# Altium PCB main.PcbDoc (part 1 of 2)
Units mm, origin at the board's own origin, x right, y up, seen from the top; angles counter-clockwise.
Board outline 184.25 x 118.77 mm, 4 copper layers (TopLayer, GND, VCC, BottomLayer); 161 components, 153 nets, 675 pads, 230 vias.
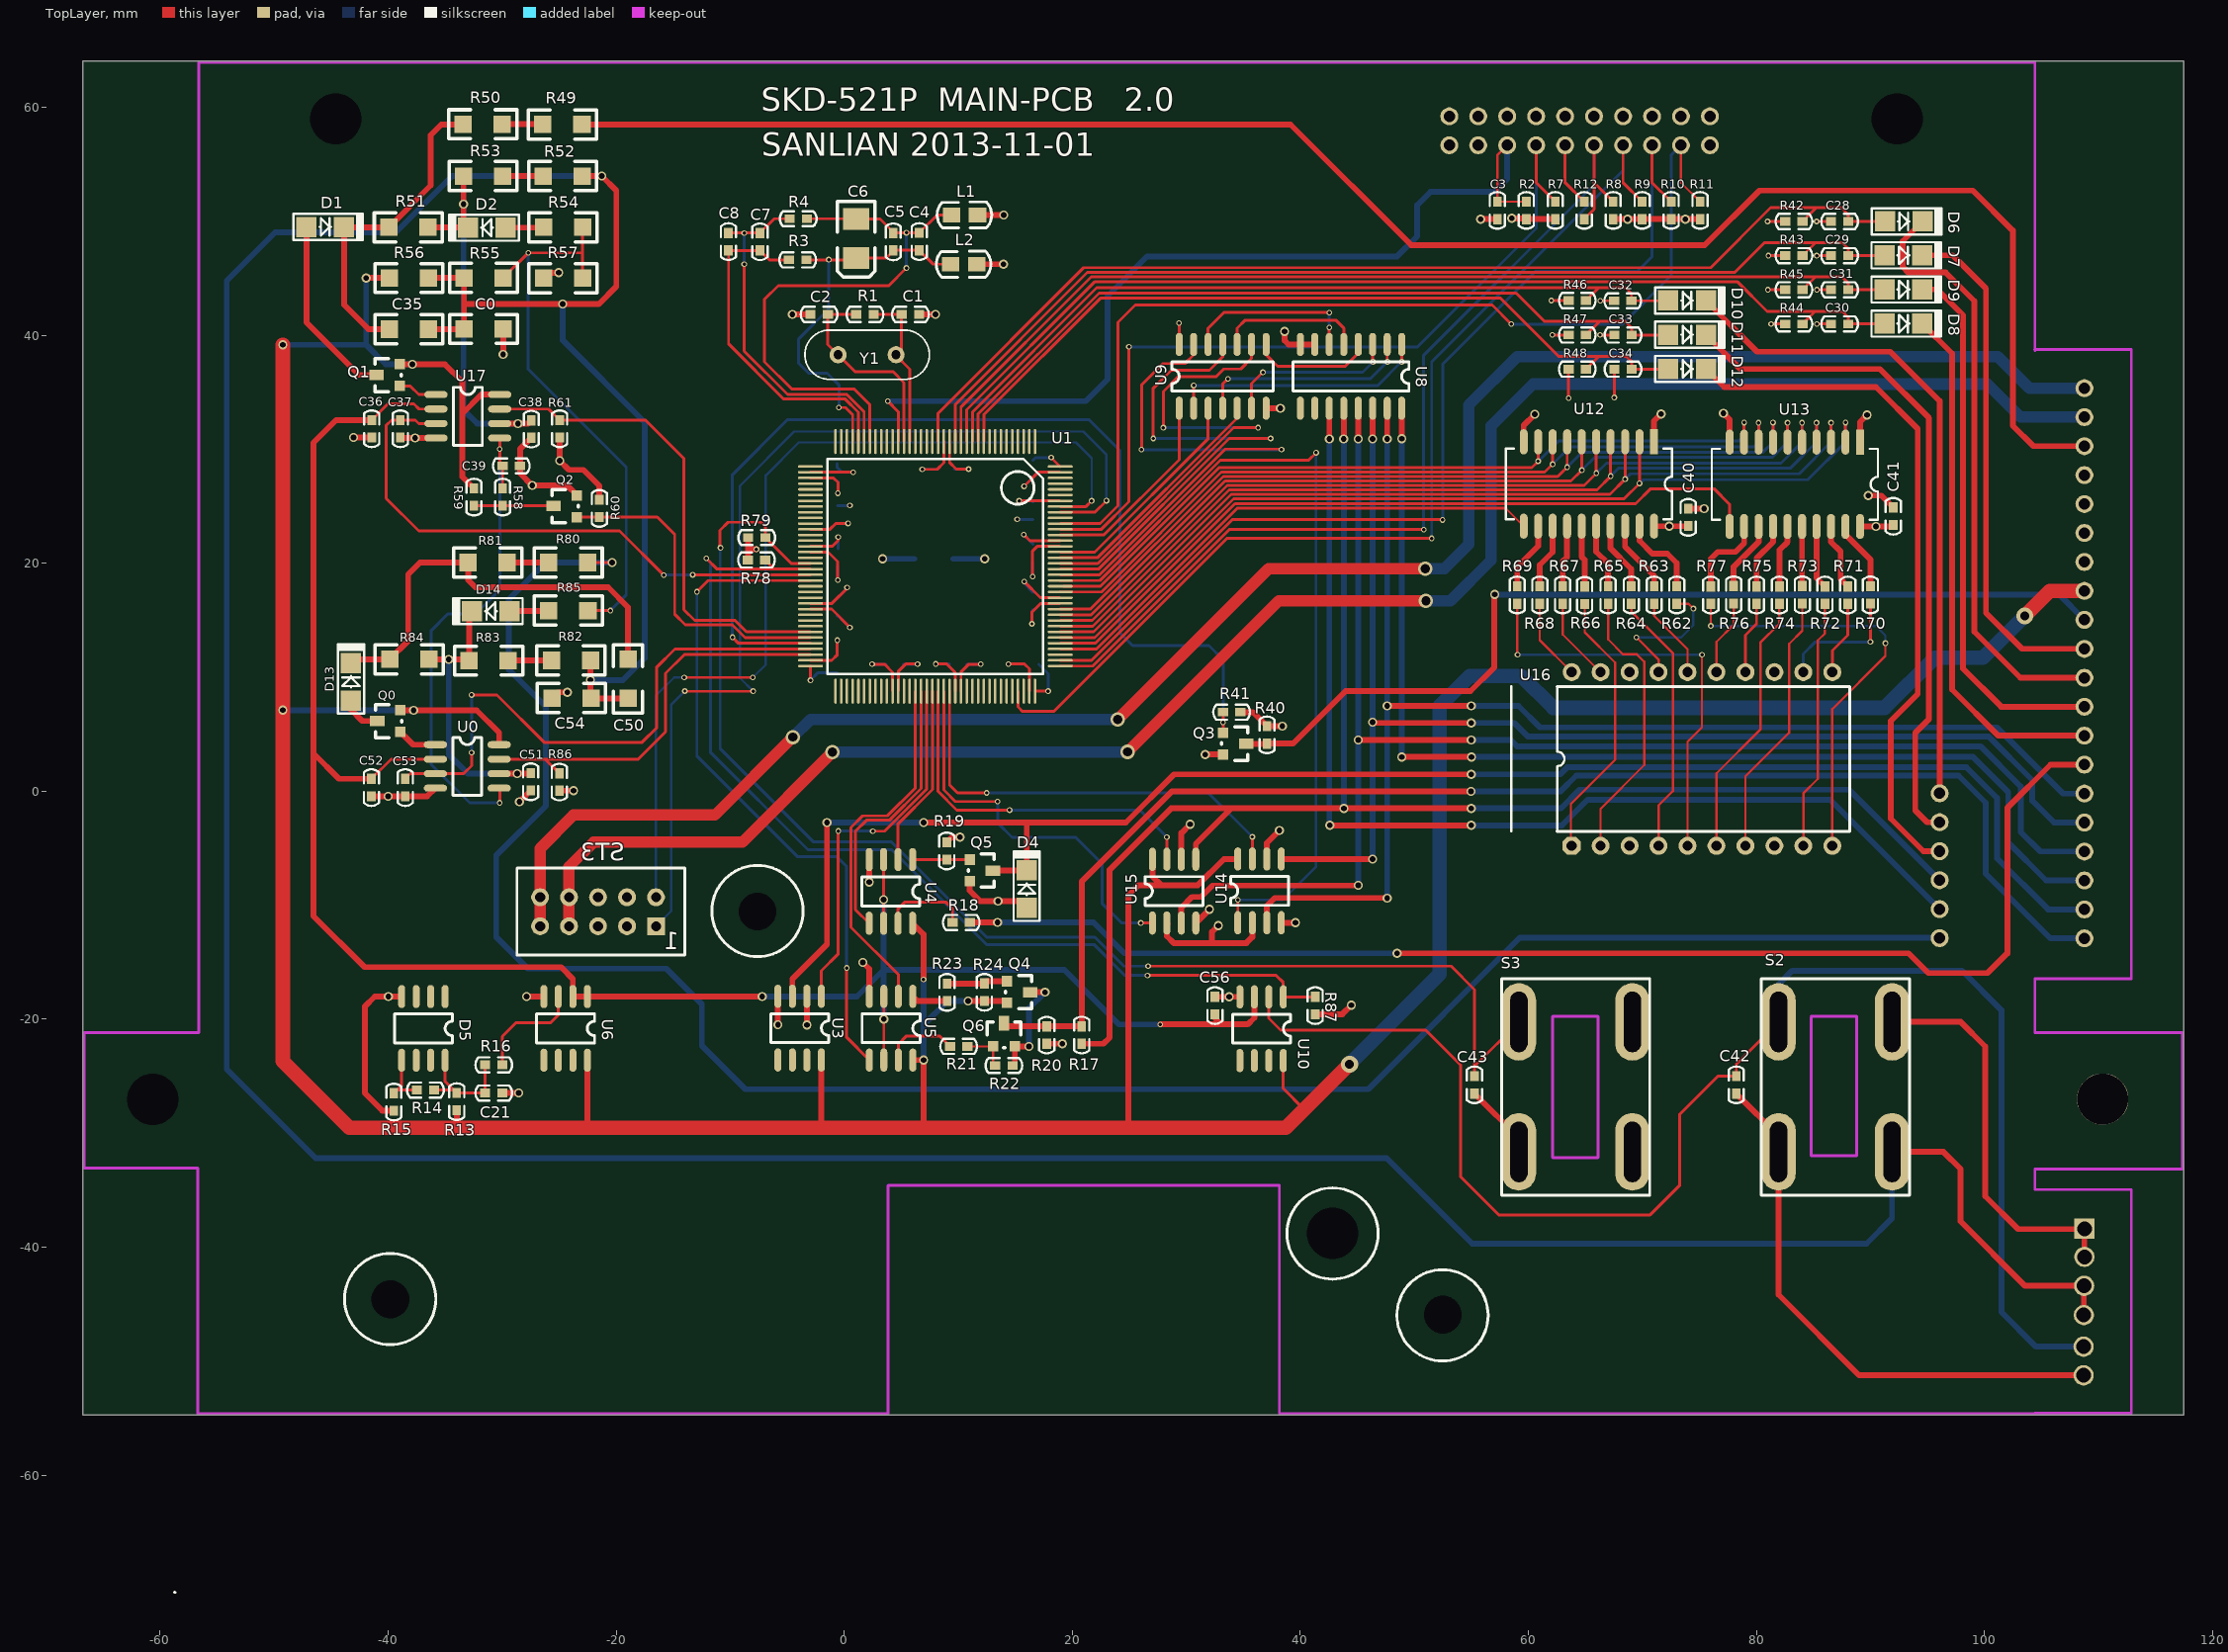
[diagram p0: TopLayer view]
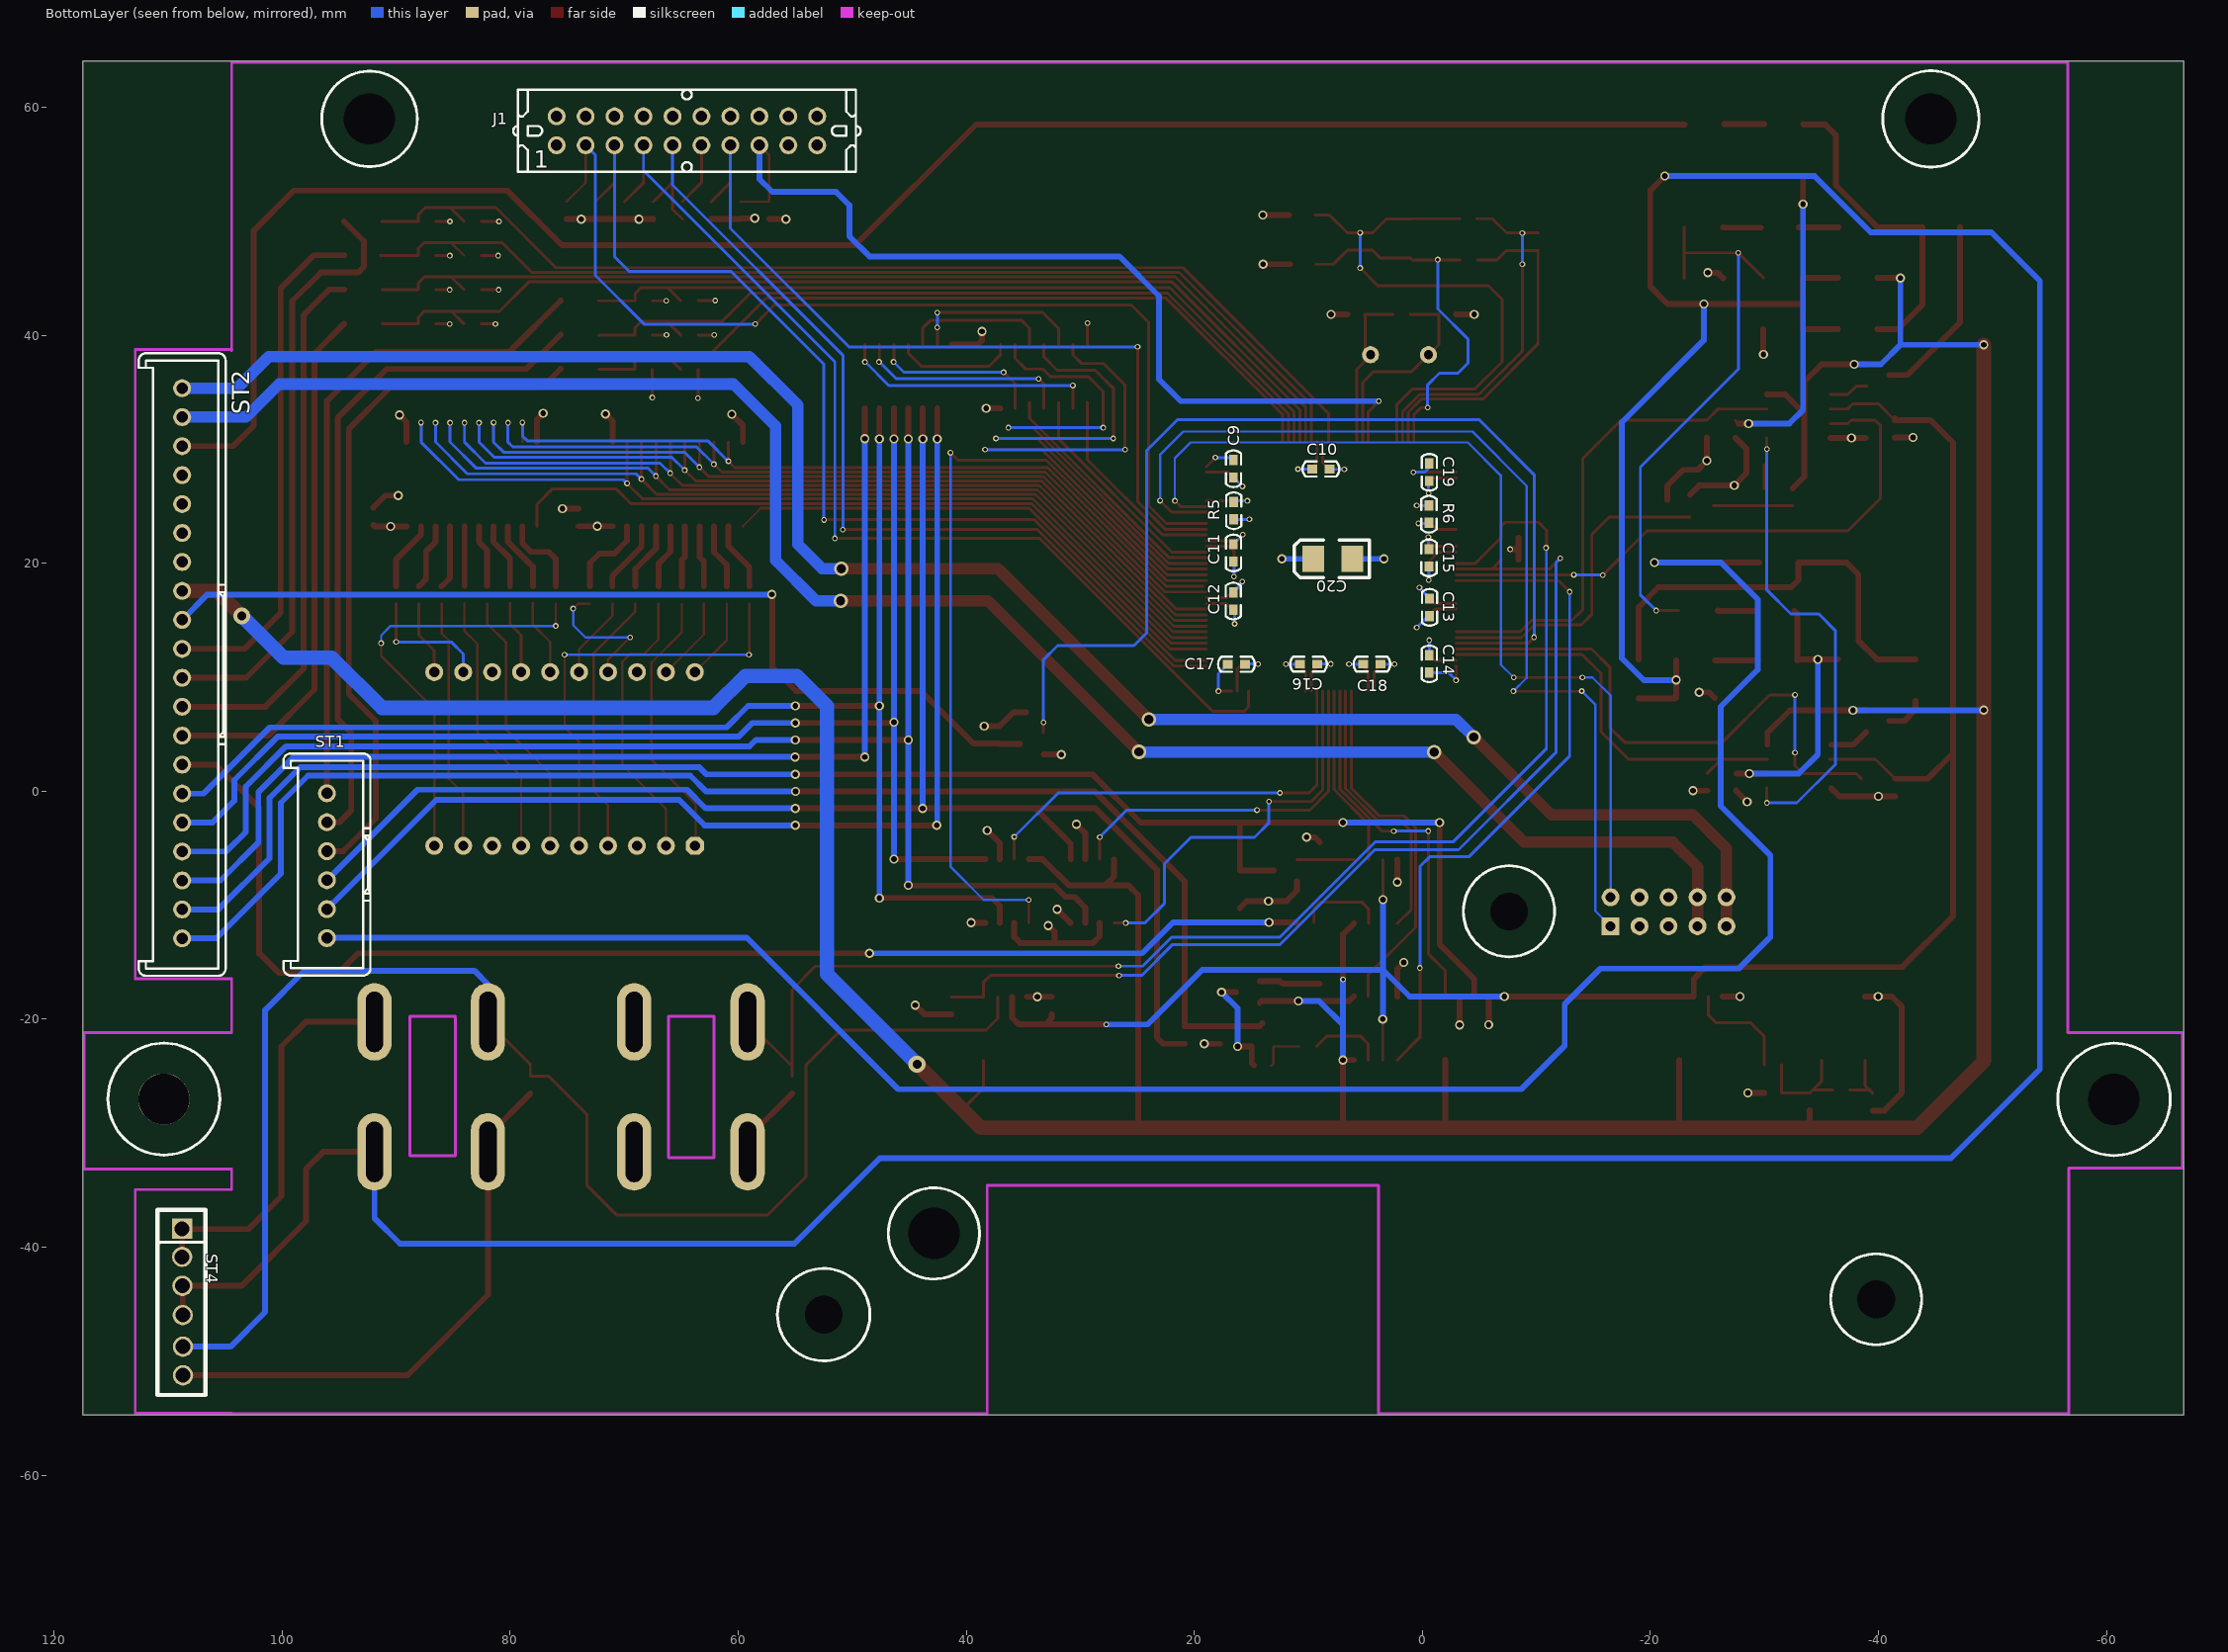
[diagram p1: BottomLayer view, seen from below]
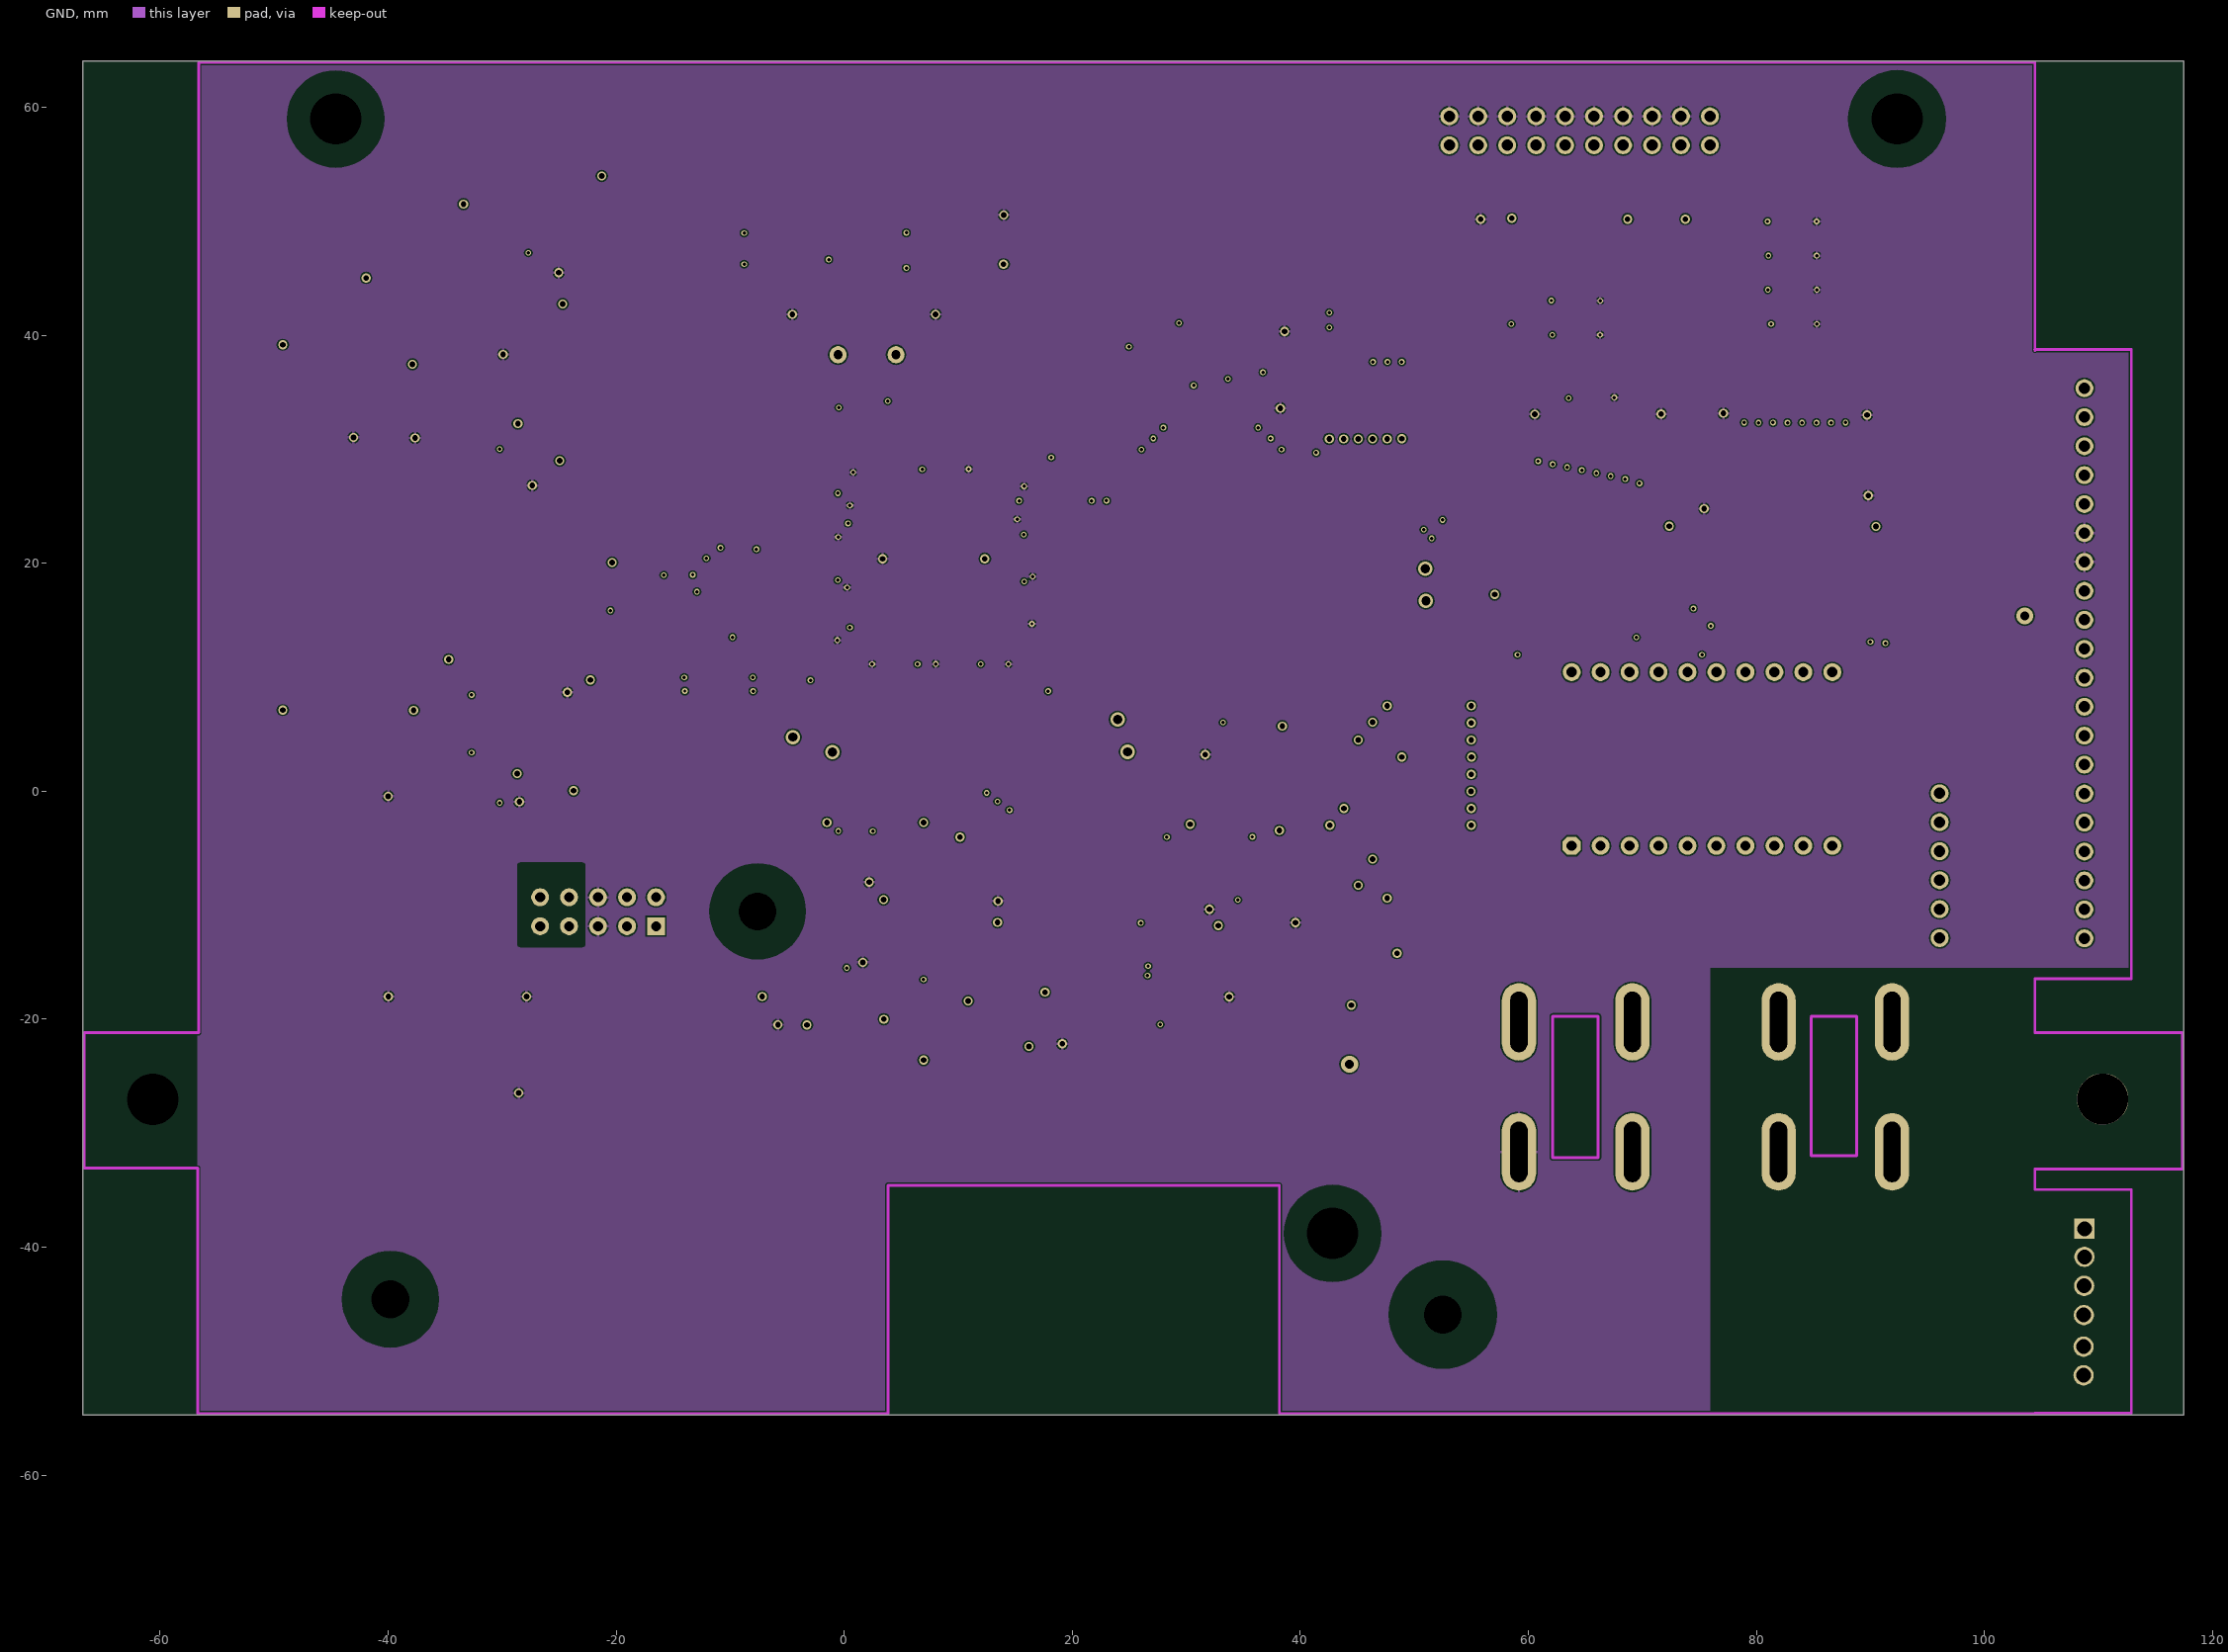
[diagram p2: GND]
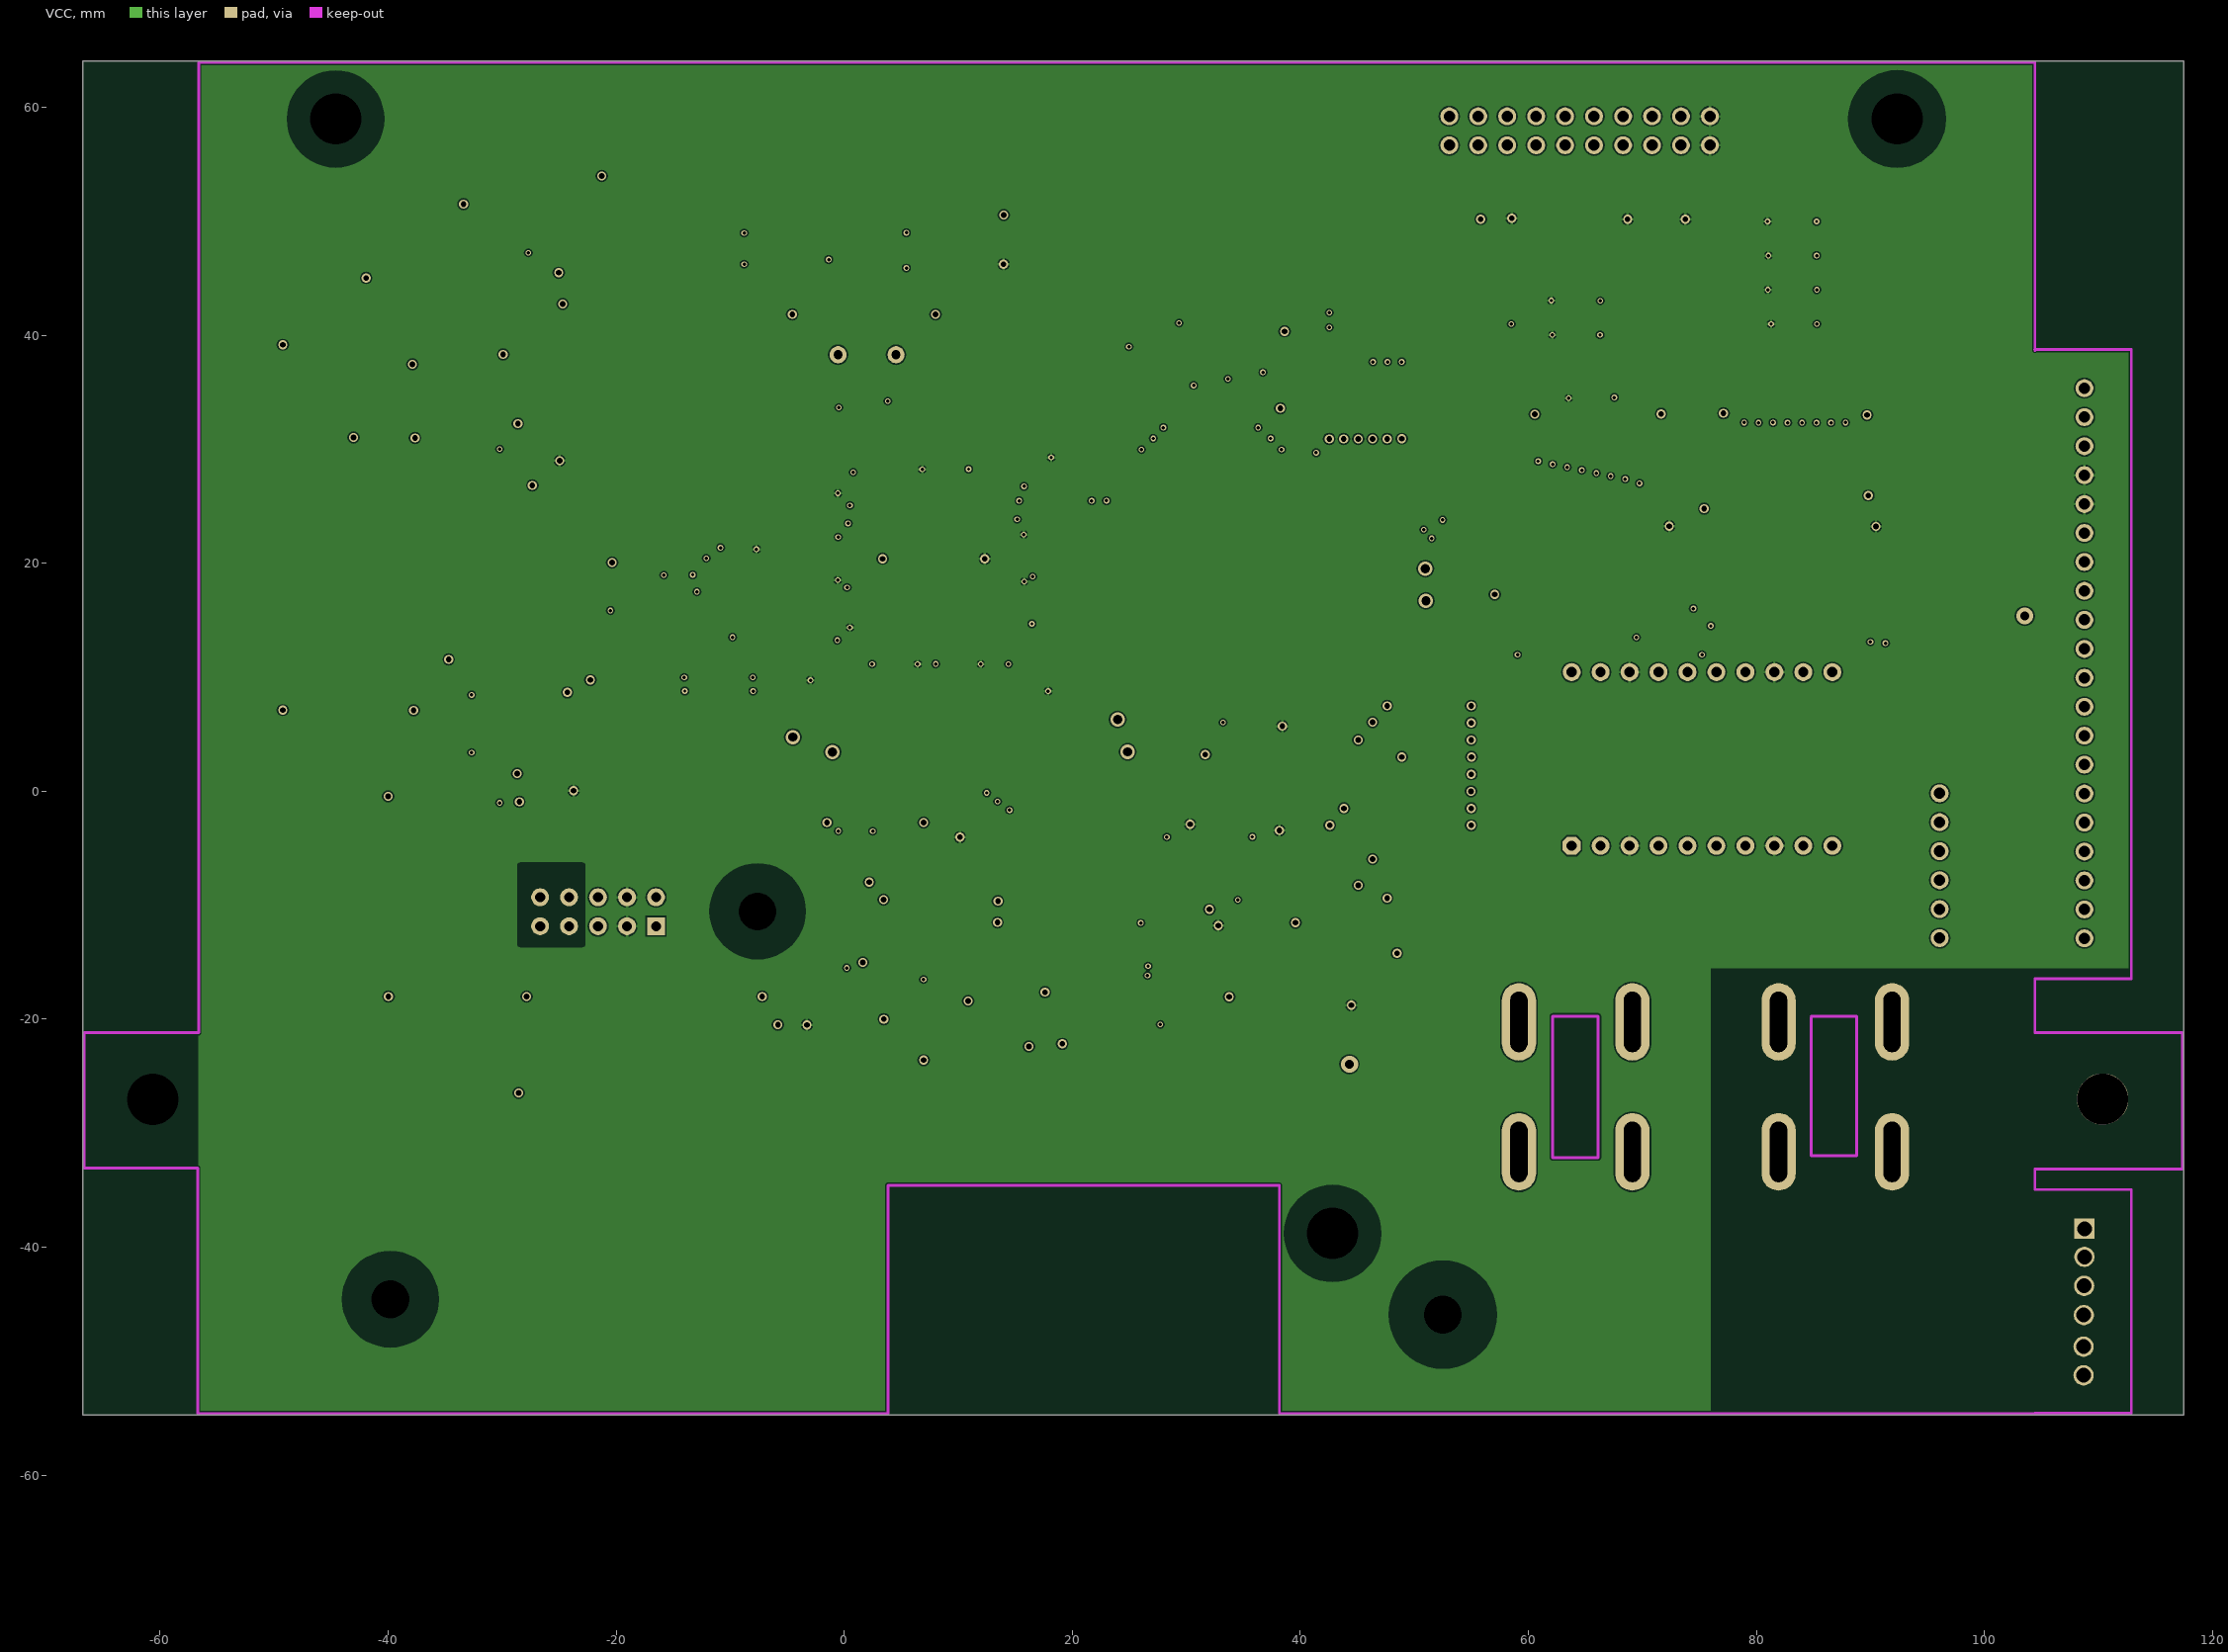
[diagram p3: VCC]

## Layer stack, top to bottom
TopLayer: signal copper 0.0356
Dielectric: core 0.32, FR-4, Dk 4.8
GND: signal copper 0.0356
Dielectric: prepreg 0.32, FR-4, Dk 4.8
VCC: signal copper 0.0356
Dielectric: core 0.32, FR-4, Dk 4.8
BottomLayer: signal copper 0.0356

## Board outline
-66.777,-54.711 117.475,-54.711 117.475,64.059 -66.777,64.059

## Design rules (kind name [scope] priority, off if disabled: settings)
Clearance [All] p1: gap=0.127
ComponentClearance [All] p1: gap=0.254 collisioncheckmode=3 verticalgap=0.254
PolygonConnect [All] p1: connectstyle=Relief reliefconductorwidth=0.254 reliefentries=4 polygonreliefangle="90 Angle"
RoutingVias [All] p1: holewidth=0.711 width=1.27 viastyle="Through Hole" minholewidth=0.711 minwidth=1.27 maxholewidth=0.711 maxwidth=1.27
SolderMaskExpansion [All] p1: expansion=0.102
TestPointUsage [All] p1: valid=0 allowmultiple=FALSE
Testpoint [All] p1: side=15 testpointundercomponent=TRUE minsize=1.016 maxsize=2.54 preferedsize=1.524 minholesize=0.508 maxholesize=1.016 preferedholesize=0.813 testpointgrid=0.025 style=1023 order=0123456789
Width [All] p1: maxlimit=1.524 minlimit=0.203 preferedwidth=0.508
18 further rules are at their usual default settings.

## Components (designator, comment, footprint, x,y, rotation, side; value= is the part's Value field where it differs from the comment)
C0 "47nF/100V" 1206 -31.687,40.558 r180 top
C1 "20P" 0603 6.563,41.835 r0 top
C2 "20P" 0603 -2.962,41.835 r180 top
C3 "104" 0603 57.277,51.714 r90 top
C4 "100nF" 0603 6.583,47.455 r270 top
C5 "100nF" 0603 4.297,47.439 r270 top
C6 "10uF/10V" C-坦电容 1.046,46.769 r270 top
C7 "10nF" 0603 -7.387,47.443 r270 top
C8 "10nF" 0603 -10.155,47.452 r270 top
C9 "104" 0603 16.561,29.058 r90 bottom
C10 "104" 0603 8.128,28.27 r180 bottom
C11 "104" 0603 16.561,21.666 r90 bottom
C12 "104" 0603 16.575,17.45 r90 bottom
C13 "104" 0603 -0.635,15.367 r270 bottom
C14 "104" 0603 -0.61,10.414 r270 bottom
C15 "104" 0603 -0.584,19.71 r270 bottom
C16 "104" 0603 10.744,11.151 r0 bottom
C17 "104" 0603 17.063,11.141 r0 bottom
C18 "104" 0603 5.182,11.151 r0 bottom
C19 "104" 0603 -0.61,27.229 r270 bottom
C20 "10uF/10V" C-坦电容 9.576,20.396 r0 bottom
C21 "104" 0603 -31.496,-26.467 r180 top
C28 "1nF" 0603 88.062,49.987 r0 top
C29 "1nF" 0603 88.062,46.99 r0 top
C30 "1nF" 0603 88.062,40.996 r0 top
C31 "1nF" 0603 88.062,43.993 r0 top
C32 "1nF" 0603 69.037,43.023 r0 top
C33 "1nF" 0603 69.063,40.026 r0 top
C34 "1nF" 0603 69.063,37.029 r0 top
C35 "47nF/100V" 1206 -38.24,40.532 r180 top
C36 "1nF" 0603 -41.441,32.565 r90 top
C37 "1nF" 0603 -38.927,32.565 r90 top
C38 "1nF" 0603 -27.445,32.534 r90 top
C39 "1nF" 0603 -29.96,28.547 r180 top
C40 "104" 0603 74.016,24.79 r90 top
C41 "104" 0603 91.999,24.892 r90 top
C42 "104" 0603 78.232,-26.518 r270 top
C43 "104" 0603 55.27,-24.994 r90 top
C50 "47nF/100V" 1206 -18.961,9.928 r90 top
C51 "1nF" 0603 -27.496,1.597 r90 top
C52 "1nF" 0603 -41.466,1.089 r90 top
C53 "1nF" 0603 -38.494,1.089 r90 top
C54 "47nF/100V" 1206 -23.864,8.176 r0 top
C56 "1nF" 0603 32.512,-19.558 r270 top
D1 "LL4148" DIOS130A -47.168,49.505 r270 top
D2 "LL4148" DIOS130A -29.68,49.442 r90 top
D4 "LL4148" DIOS130A 16.002,-10.236 r0 top
D5 "LM285M" SO-8 -35.001,-18.009 r270 top
D6 "LL103A" DIOS130A 91.262,49.987 r270 top
D7 "LL103A" DIOS130A 91.237,47.015 r270 top
D8 "LL103A" DIOS130A 91.237,41.021 r270 top
D9 "LL103A" DIOS130A 91.237,44.018 r270 top
D10 "LL103A" DIOS130A 72.263,43.049 r270 top
D11 "LL103A" DIOS130A 72.263,40.052 r270 top
D12 "LL103A" DIOS130A 72.263,37.054 r270 top
D13 "LL4148" DIOS130A -43.256,7.95 r0 top
D14 "LL4148" DIOS130A -29.34,15.8 r90 top
J1 "JTAG" J-TAG 75.921,56.667 r180 bottom
L1 "10uH" INDUCTOR 11.689,50.554 r180 top
L2 "10uH" INDUCTOR 11.613,46.236 r180 top
Q0 "BC807-40" SOT-23 -38.926,5.204 r90 top
Q1 "BC807-40" SOT-23 -38.977,35.557 r90 top
Q2 "BC817-40" SOT-23 -23.457,24.051 r90 top
Q3 "BC817-40" SOT-23 33.223,5.131 r270 top
Q4 "BC807-40" SOT-23 14.274,-16.663 r270 top
Q5 "BC817-40" SOT-23 10.998,-5.994 r270 top
Q6 "BC807-40" SOT-23 13.061,-22.381 r0 top
R1 "1M" 0603 2.575,41.835 r0 top
R2 "1K" 0603 59.817,51.714 r90 top
R3 "10" 0603 -4.847,46.617 r180 top
R4 "10" 0603 -4.796,50.223 r180 top
R5 "10K" 0603 16.535,25.375 r90 bottom
R6 "10K" 0603 -0.584,23.546 r270 bottom
R7 "10K" 0603 62.357,51.714 r90 top
R8 "10K" 0603 67.437,51.714 r90 top
R9 "10K" 0603 69.977,51.714 r90 top
R10 "10K" 0603 72.517,51.714 r90 top
R11 "10K" 0603 75.057,51.714 r90 top
R12 "0" 0603 64.897,51.714 r90 top
R13 "68K" 0603 -33.985,-27.991 r270 top
R14 "100K" 0603 -37.49,-26.213 r180 top
R15 "68K" 0603 -39.497,-28.016 r270 top
R16 "3.9K" 0603 -31.496,-24.003 r180 top
R17 "10K" 0603 20.827,-22.148 r270 top
R18 "2.7K" 0603 9.5,-11.506 r180 top
R19 "3.9K" 0603 8.992,-5.994 r270 top
R20 "2.7K" 0603 17.76,-20.628 r90 top
R21 "3.9K" 0603 9.276,-22.381 r180 top
R22 "1K" 0603 13.238,-24.057 r180 top
R23 "3.9K" 0603 9.016,-18.404 r270 top
R24 "1K" 0603 12.293,-16.866 r90 top
R40 "2K" 0603 37.076,4.18 r270 top
R41 "3.9K" 0603 33.211,6.941 r180 top
R42 "10K" 0603 84.049,49.987 r0 top
R43 "10K" 0603 84.049,46.99 r0 top
R44 "10K" 0603 84.049,40.996 r0 top
R45 "10K" 0603 84.049,43.993 r0 top
R46 "10K" 0603 65.049,43.049 r0 top
R47 "10K" 0603 65.049,40.026 r0 top
R48 "10K" 0603 65.049,37.029 r0 top
R49 "2.2M" 1206 -24.651,58.49 r0 top
R50 "2.2M" 1206 -31.636,58.515 r0 top
R51 "1M" 1206 -38.164,49.473 r0 top
R52 "330K" 1206 -24.753,53.969 r180 top
R53 "180K" 1206 -31.738,53.969 r180 top
R54 "68K" 1206 -24.6,49.473 r0 top
R55 "1.5K" 1206 -31.687,45.033 r180 top
R56 "1.5K" 1206 -38.24,45.028 r180 top
R57 "1.5K" 1206 -24.727,45.003 r180 top
R58 "220K" 0603 -29.96,26.565 r90 top
R59 "68K" 0603 -32.474,25.041 r270 top
R60 "3.9K" 0603 -21.476,24.051 r270 top
R61 "10K" 0603 -24.956,32.56 r90 top
R62 "1K" 0603 73.012,17.977 r90 top
R63 "1K" 0603 71.031,17.977 r90 top
R64 "1K" 0603 69.024,17.977 r90 top
R65 "1K" 0603 66.992,17.977 r90 top
R66 "1K" 0603 64.935,17.952 r90 top
R67 "1K" 0603 63.004,17.977 r90 top
R68 "1K" 0603 60.998,17.977 r90 top
R69 "1K" 0603 59.016,17.977 r90 top
R70 "1K" 0603 89.992,17.983 r90 top
R71 "1K" 0603 88.011,17.972 r90 top
R72 "1K" 0603 86.004,17.972 r90 top
R73 "1K" 0603 84.023,17.997 r90 top
R74 "1K" 0603 82.017,17.972 r90 top
R75 "1K" 0603 80.01,17.972 r90 top
R76 "1K" 0603 78.003,17.997 r90 top
R77 "1K" 0603 75.997,17.972 r90 top
R78 "10K" 0603 -6.934,20.295 r0 top
R79 "10K" 0603 -8.433,22.25 r180 top
R80 "2.2M" 1206 -24.143,20.063 r0 top
R81 "2.2M" 1206 -31.204,20.063 r0 top
R82 "330K" 1206 -24.031,11.482 r180 top
R83 "180K" 1206 -31.245,11.457 r180 top
R84 "1M" 1206 -38.086,11.576 r0 top
R85 "68K" 1206 -24.133,15.851 r0 top
R86 "10K" 0603 -24.981,1.572 r90 top
R87 "3.9K" 0603 41.3,-18.034 r90 top
S2 "SW PB2" BUTTON 80.416,-35.433 r0 top
S3 "SW-PB" BUTTON 57.644,-35.433 r0 top
ST1 "CON6" STOCKO6V 96.063,-0.178 r270 bottom
ST2 "CON20" STOCKO20V 108.763,35.357 r270 bottom
ST3 "CON10" CON10 -16.51,-11.836 r180 top
ST4 "CON6" 2.54-6 109.042,-42.672 r270 bottom
U0 "LM293" SO-8 -35.852,4.086 r0 top
U1 "STM32F103ZE" STM32F103ZE 16.739,30.683 r270 top
U3 "LM293" SO-8 -2.007,-17.983 r270 top
U4 "LM293" SO-8 5.994,-5.994 r270 top
U5 "LM293" SO-8 6.012,-17.993 r270 top
U6 "LM258D" SO-8 -22.53,-18.009 r270 top
U8 "ULN2003AD" SO-16 48.886,39.191 r270 top
U9 "74HCT04D" SO-14 29.375,33.603 r90 top
U10 "LM293" SO-8 38.506,-18.034 r270 top
U12 "TC74HC573AF" 74HC573 71.018,30.658 r270 top
U13 "TC74HC573AF" 74HC573 89.078,30.632 r270 top
U14 "LM293D" SO-8 34.519,-11.532 r90 top
U15 "LM293D" SO-8 27.026,-11.557 r90 top
U16 "5101BH×2" DIP-20 63.793,-4.784 r90 top
U17 "LM293" SO-8 -35.802,34.8 r0 top
Y1 "8M" TX 1.915,38.177 r180 top

## Footprints (in the part's own frame and the unit in brackets; to place one, negate y for a bottom-side part, rotate by r counter-clockwise, add the part's x,y. Pads: shape width x height; smd on the part's side, far side on the other; paste and mask are expansions set on the pad)
2.54-6 [mil]
  rect 70x70 hole 51.18: 1(-169,11)
  round 70 hole 51.18: 2(-72,11) 3(28,12) 4(129,13) 5(238,14) 6(337,14)
  silkscreen extent -234,-74 405,93
74HC573 [mm]
  rect 2.2x0.7 smd: 1(0,0)
  oval 2.2x0.7 smd: 2(0,-1.27) 3(0,-2.54) 4(0,-3.81) 5(0,-5.08) 6(0,-6.35) 7(0,-7.62) 8(0,-8.89) 9(0,-10.16) 10(0,-11.43) 11(7.4,-11.43) 12(7.4,-10.16) 13(7.4,-8.89) 14(7.4,-7.62) 15(7.4,-6.35) 16(7.4,-5.08) 17(7.4,-3.81) 18(7.4,-2.54) 19(7.4,-1.27) 20(7.4,0)
  silkscreen extent 0.59,-13 6.81,1.57
0603 [mil]
  rect 35x30 smd: 1(0,0) 2(-60,0)
  silkscreen extent -93,-26 33,26
1206 [mil]
  rect 60x60 smd: 1(-70,0) 2(65,0)
  silkscreen extent -120,-50 115,50
BUTTON [mm]
  oval 3x6.8 hole 1.5 slot 5.3 at 90 deg: 1(1.525,15.2) 2(1.525,3.8) 3(11.475,3.8) 4(11.475,15.2)
  silkscreen extent 0,0 13,19
C-坦电容 [mil]
  rect 75x90 smd: 1(0,0) 2(-135,0)
  silkscreen extent -195,-65 65,65
CON10 [mm]
  rect 1.57x1.57 hole 0.88: 1(0,0)
  round 1.57 hole 0.88: 2(0,-2.54) 3(2.54,0) 4(2.54,-2.54) 5(5.08,0) 6(5.08,-2.54) 7(7.62,0) 8(7.62,-2.54) 9(10.16,0) 10(10.16,-2.54)
  silkscreen extent -2.54,-5.08 12.19,2.54
DIOS130A [mil]
  rect 70x70 smd: 1(0,0) 2(0,130)
  silkscreen extent -45,-45 45,195
DIP-20 [mil]
  oct 62x62 hole 35: 1(0,0)
  round 62 hole 35: 2(0,-100) 3(0,-200) 4(0,-300) 5(0,-400) 6(0,-500) 7(0,-600) 8(0,-700) 9(0,-800) 10(0,-900) 11(600,-900) 12(600,-800) 13(600,-700) 14(600,-600) 15(600,-500) 16(600,-400) 17(600,-300) 18(600,-200) 19(600,-100) 20(600,0)
  silkscreen extent 50,-960 550,50
INDUCTOR [mil]
  rect 60x50 smd: 1(0,0) 2(90,0)
  silkscreen extent -49,-45 139,45
J-TAG [mil]
  round 62 hole 39.37: 1(0,0) 2(0,100) 3(100,0) 4(100,100) 5(200,0) 6(200,100) 7(300,0) 8(300,100) 9(400,0) 10(400,100) 11(500,0) 12(500,100) 13(600,0) 14(600,100) 15(700,0) 16(700,100) 17(800,0) 18(800,100) 19(900,0) 20(900,100)
  silkscreen extent -150,-92 1050,192
SO-8 [mil]
  oval 80x24 smd: 1(0,0) 2(0,-50) 3(0,-100) 4(0,-150) 5(220,-150) 6(220,-100) 7(220,-50) 8(220,0)
  silkscreen extent 60,-175 160,25
SO-14 [mil]
  oval 80x24 smd: 1(0,0) 2(0,-50) 3(0,-100) 4(0,-150) 5(0,-200) 6(0,-250) 7(0,-300) 8(220,-300) 9(220,-250) 10(220,-200) 11(220,-150) 12(220,-100) 13(220,-50) 14(220,0)
  silkscreen extent 60,-325 160,25
SO-16 [mil]
  oval 80x24 smd: 1(0,0) 2(0,-50) 3(0,-100) 4(0,-150) 5(0,-200) 6(0,-250) 7(0,-300) 8(0,-350) 9(220,-350) 10(220,-300) 11(220,-250) 12(220,-200) 13(220,-150) 14(220,-100) 15(220,-50) 16(220,0)
  silkscreen extent 60,-375 160,25
SOT-23 [mil]
  rect 36x36 smd: 1(0,0) 2(75,0)
  rect 36x50 smd: 3(38,80)
  silkscreen extent -20,-5 95,85
STM32F103ZE [mm]
  oval 2.2x0.22 smd: 1(0,0) 2(0,-0.5) 3(0,-1) 4(0,-1.5) 5(0,-2) 6(0,-2.5) 7(0,-3) 8(0,-3.5) 9(0,-4) 10(0,-4.5) 11(0,-5) 12(0,-5.5) 13(0,-6) 14(0,-6.5) 15(0,-7) 16(0,-7.5) 17(0,-8) 18(0,-8.5) 19(0,-9) 20(0,-9.5) 21(0,-10) 22(0,-10.5) 23(0,-11) 24(0,-11.5) 25(0,-12) 26(0,-12.5) 27(0,-13) 28(0,-13.5) 29(0,-14) 30(0,-14.5) 31(0,-15) 32(0,-15.5) 33(0,-16) 34(0,-16.5) 35(0,-17) 36(0,-17.5) 73(21.9,-17.5) 74(21.9,-17) 75(21.9,-16.5) 76(21.9,-16) 77(21.9,-15.5) 78(21.9,-15) 79(21.9,-14.5) 80(21.9,-14) 81(21.9,-13.5) 82(21.9,-13) 83(21.9,-12.5) 84(21.9,-12) 85(21.9,-11.5) 86(21.9,-11) 87(21.9,-10.5) 88(21.9,-10) 89(21.9,-9.5) 90(21.9,-9) 91(21.9,-8.5) 92(21.9,-8) 93(21.9,-7.5) 94(21.9,-7) 95(21.9,-6.5) 96(21.9,-6) 97(21.9,-5.5) 98(21.9,-5) 99(21.9,-4.5) 100(21.9,-4) 101(21.9,-3.5) 102(21.9,-3) 103(21.9,-2.5) 104(21.9,-2) 105(21.9,-1.5) 106(21.9,-1) 107(21.9,-0.5) 108(21.9,0)
  oval 0.22x2.2 smd: 37(2.2,-19.7) 38(2.7,-19.7) 39(3.2,-19.7) 40(3.7,-19.7) 41(4.2,-19.7) 42(4.7,-19.7) 43(5.2,-19.7) 44(5.7,-19.7) 45(6.2,-19.7) 46(6.7,-19.7) 47(7.2,-19.7) 48(7.7,-19.7) 49(8.2,-19.7) 50(8.7,-19.7) 51(9.2,-19.7) 52(9.7,-19.7) 53(10.2,-19.7) 54(10.7,-19.7) 55(11.2,-19.7) 56(11.7,-19.7) 57(12.2,-19.7) 58(12.7,-19.7) 59(13.2,-19.7) 60(13.7,-19.7) 61(14.2,-19.7) 62(14.7,-19.7) 63(15.2,-19.7) 64(15.7,-19.7) 65(16.2,-19.7) 66(16.7,-19.7) 67(17.2,-19.7) 68(17.7,-19.7) 69(18.2,-19.7) 70(18.7,-19.7) 71(19.2,-19.7) 72(19.7,-19.7) 109(19.7,2.2) 110(19.2,2.2) 111(18.7,2.2) 112(18.2,2.2) 113(17.7,2.2) 114(17.2,2.2) 115(16.7,2.2) 116(16.2,2.2) 117(15.7,2.2) 118(15.2,2.2) 119(14.7,2.2) 120(14.2,2.2) 121(13.7,2.2) 122(13.2,2.2) 123(12.7,2.2) 124(12.2,2.2) 125(11.7,2.2) 126(11.2,2.2) 127(10.7,2.2) 128(10.2,2.2) 129(9.7,2.2) 130(9.2,2.2) 131(8.7,2.2) 132(8.2,2.2) 133(7.7,2.2) 134(7.2,2.2) 135(6.7,2.2) 136(6.2,2.2) 137(5.7,2.2) 138(5.2,2.2) 139(4.7,2.2) 140(4.2,2.2) 141(3.7,2.2) 142(3.2,2.2) 143(2.7,2.2) 144(2.2,2.2)
  silkscreen extent 1.52,-18.2 20.4,0.7
STOCKO6V [mil]
  round 62 hole 39.37: 1(0,0) 2(100,0) 3(200,0) 4(300,0) 5(400,0) 6(500,0)
  silkscreen extent -138,-150 629,150
STOCKO20V [mil]
  round 62 hole 39.37: 1(0,0) 2(100,0) 3(200,0) 4(300,0) 5(400,0) 6(500,0) 7(600,0) 8(700,0) 9(800,0) 10(900,0) 11(1000,0) 12(1100,0) 13(1200,0) 14(1300,0) 15(1400,0) 16(1500,0) 17(1600,0) 18(1700,0) 19(1800,0) 20(1900,0)
  silkscreen extent -121,-150 2029,150
TX [mm]
  round 1.5 hole 0.8: 1(2.448,-0.117) 2(-2.632,-0.117)
  silkscreen extent -5.55,-2.28 5.37,2.04

## Part data
C35 C36 C37 C38 C39 C50 C51 C52 C53: library part CAP, "Capacitor"
C40 C41: library part CAP
R49 R50 R51 R52 R53 R54 R55 R56 R57 R58 R59 R60 R61 R80 R81 R82 R83 R84 R85 R86: library part RES2
ST2 ST3: "Connector"

## Free pads (board coordinates)
  round 4.2 hole 4.5: ""(-60.655,-27.026) ""(-44.602,58.979) ""(42.834,-38.786) ""(92.329,58.979)
  round 3 hole 3.3: ""(-39.803,-44.566) ""(-7.596,-10.53) ""(52.501,-45.912)
  round 4.5 hole 4.5: ""(110.363,-27)

## Via types
v1: diameter 0.5, hole 0.3, TopLayer to BottomLayer, 125 vias
v2: diameter 0.8, hole 0.5, TopLayer to BottomLayer, 97 vias
v3: diameter 1.27, hole 0.8, TopLayer to BottomLayer, 6 vias
v4: diameter 1.5, hole 0.8, TopLayer to BottomLayer, 2 vias

## Nets (pads, with @x,y where several pads share a name; then routed paths per layer and width w, separated by ;. In a path a pad name is that pad's centre, name@x,y a point inside that pad or via, vN(x,y) a via of type N, cw(c..) or ccw(c..) an arc to the next point about the centre after c; other vN are vias at no path point)
3.3V: C9.1 C10.1 C11.1 C12.1 C13.1 C14.1 C15.1 C16.1 C17.1 C18.1 C19.1 C20.1 C40.2 C41.2 J1.1 J1.2 L2.1 R2.2 R7.2 R8.2 R9.2 R10.2 R11.2 R19.2 R40.2 R41.2 R42.2 R43.2 R44.2 R45.2 R46.2 R47.2 R48.2 R60.2 R61.2 R78.2 R79.1 R86.2 R87.2 ST2.4 ST2.5 ST3.3 ST3.4 U1.17 U1.39 U1.52 U1.62 U1.72 U1.84 U1.95 U1.108 U1.121 U1.131 U1.144 U3.2 U12.20 U13.20 U14.2 U14.6 U15.2 U15.6 U16.3 U16.8 U16.13 U16.18 | length 126.6
  TopLayer w0.254: v1(-2.961,9.741) U1.72@-2.961,10.983 ; U1.62@-2.961,15.983 -1.113,15.983 v1(0.5,14.37) ; U1.52@-2.961,20.983 -1.413,20.983 -0.57,20.14 v1(-0.57,18.52) ; U1.39@-2.961,27.483 -0.953,27.483 -0.55,27.08 v1(-0.55,26.14) ; U1.84@4.739,8.783 4.739,10.509 5.39,11.16 v1(6.44,11.16) ; v1(6.84,28.24) 8.15,28.24 8.739,28.829 U1.17@8.739,30.683 ; U1.95@10.239,8.783 10.239,10.459 10.93,11.15 v1(11.97,11.15) ; v1(15.75,22.52) 16.287,21.983 U1.131@18.939,21.983 ; v1(15.78,18.4) 17.197,16.983 U1.121@18.939,16.983 ; U1.108@16.739,8.783 v1(17.887,8.783) ; v1(18.152,29.27) U1.144@18.939,28.483 ; v1(62.009,43.049) R46.2@63.525,43.049 ; v1(62.106,40.026) R47.2@63.525,40.026 ; v1(63.525,34.475) R48.2@63.525,37.029 ; v1(80.973,49.987) R42.2@82.525,49.987 ; v1(80.997,43.993) R45.2@82.525,43.993 ; v1(81.05,46.99) R43.2@82.525,46.99 ; v1(81.286,40.996) R44.2@82.525,40.996
  TopLayer w0.508: R86.2@-24.981,0.048 v2(-23.728,0.048) ; R61.2@-24.956,31.036 v2(-24.956,29.006) -24.14,28.19 -22.87,28.19 -21.476,26.796 R60.2@-21.476,25.575 ; R78.2@-8.433,20.32 R79.1@-8.433,22.25 ; -8.433,21.23 v1(-7.7,21.23) ; v2(-3.277,-20.493) U3.2@-3.277,-17.983 ; R19.2@8.992,-4.47 9.432,-4.03 v2(10.15,-4.03) ; L2.1@11.613,46.236 v2(13.974,46.236) ; U15.2@28.36,-11.621 U15.2@28.296,-11.557 28.296,-12.716 28.89,-13.31 35.27,-13.31 35.789,-12.791 U14.2@35.789,-11.532 ; U15.6@29.566,-5.969 29.566,-3.664 v2(30.33,-2.9) ; 32.24,-13.31 32.24,-12.34 v2(32.8,-11.78) ; R41.2@34.735,6.941 35.838,6.941 R40.2@37.076,5.704 v2(38.414,5.704) ; U14.6@37.059,-5.944 37.059,-4.541 v2(38.17,-3.43) ; R87.2@41.3,-19.558 43.682,-19.558 v2(44.47,-18.77) ; v2(58.54,50.26) 59.747,50.26 R2.2@59.817,50.19 R7.2@62.357,50.19 ; R8.2@67.437,50.19 R11.2@75.057,50.19 ; U12.20@71.018,23.258 C40.2@74.007,23.258 ; U13.20@89.078,23.232 91.863,23.232 C41.2@91.999,23.368
  BottomLayer w0.254: v1(-2.961,9.741) -2.289,10.414 C14.1@-0.61,10.414 ; C13.1@-0.635,15.367 -0.497,15.367 v1(0.5,14.37) v1@0.5,14.34 ; v1(-0.57,18.52) C15.1@-0.57,19.696 ; v1(-0.55,26.14) C19.1@-0.55,27.169 ; C18.1@5.182,11.151 6.431,11.151 v1(6.44,11.16) ; v1(6.84,28.24) C10.1@8.098,28.24 ; C16.1@10.744,11.151 v1(11.97,11.15) ; v1@15.728,22.499 C11.1@16.561,21.666 ; v1@15.75,22.477 v1(15.75,22.52) ; v1(15.78,18.4) 15.78,18.245 C12.1@16.575,17.45 ; C9.1@16.561,29.058 16.773,29.27 v1(18.152,29.27) ; C17.1@17.063,11.141 17.887,10.317 v1(17.887,8.783)
  BottomLayer w0.508: C20.1@9.576,20.396 v2(12.326,20.396)
  other v2: 90.48,23.232 72.36,23.258 68.7,50.19 73.77,50.19
12V: Q0.2 Q1.2 Q4.2 R13.1 R24.2 R56.2 R59.2 ST2.8 U0.8 U3.8 U4.8 U5.8 U6.8 U10.8 U14.8 U15.8 U17.8 | length 400.5
  TopLayer w0.254: U10.8@38.506,-23.622 38.506,-26.075 40.34,-27.908
  TopLayer w0.508: v2(-41.927,45.028) R56.2@-39.891,45.028 ; Q1.2@-38.977,37.462 -35.021,37.462 -33.502,35.943 -33.502,27.593 R59.2@-32.474,26.565 ; Q0.2@-38.926,7.109 -32.229,7.109 -30.264,5.144 U0.8@-30.264,4.086 ; -33.985,-29.51 R13.1@-33.985,-27.991 ; -33.502,33.123 -31.825,34.8 U17.8@-30.214,34.8 ; -22.53,-29.51 U6.8@-22.53,-23.597 ; -2.007,-29.51 U3.8@-2.007,-23.571 ; U4.8@5.994,-11.582 6.952,-12.54 v1@6.952,-16.5 ; U5.8@6.012,-23.581 v2(6.961,-23.581) ; 6.952,-29.51 v2@6.952,-23.572 ; v2(10.87,-18.39) 14.097,-18.39 Q4.2@14.274,-18.568 ; 24.92,-29.51 24.92,-9.12 25.8,-8.24 31.01,-8.24 33.306,-5.944 U14.8@34.519,-5.944 ; U15.8@27.026,-5.969 27.026,-7.479 27.787,-8.24
  TopLayer w1.27: v2(-49.24,39.168) -49.24,-23.68 -43.41,-29.51 38.738,-29.51 v4(44.309,-23.939) ; v4(103.53,15.38) 105.727,17.577 ST2.8@108.763,17.577
  BottomLayer w0.508: v2(-49.24,39.168) -41.927,39.168 ; v2@-49.201,7.109 v2@-37.71,7.109 ; v2(-41.927,45.028) -41.927,39.168 ; v2@-37.962,37.462 -40.221,37.462 -41.927,39.168 ; v2@6.952,-23.572 v1@6.952,-16.5 ; 6.952,-20.5 9.062,-18.39 v2(10.87,-18.39)
  BottomLayer w1.27: v4(44.309,-23.939) 52.2,-16.048 52.2,7.46 54.86,10.12 59.37,10.12 62.17,7.32 91.25,7.32 95.65,11.72 99.87,11.72 v4(103.53,15.38)
  other v1: 6.952,-16.52
  other v2: -49.24,7.12 -37.76,7.109 -37.862,37.462
230L: S2.4 ST4.1 ST4.2 | length 34.5
  TopLayer w0.508: S2.4@91.891,-20.233 97.913,-20.233 100.06,-22.38 100.06,-35.52 102.945,-38.405 108.73,-38.405 108.763,-38.438 ST4.2@108.763,-40.85
A1: R62.2 U16.17 | length 12.4
  TopLayer w0.203: v1(69.48,13.5) 71.413,11.567 U16.17@71.413,10.456 ; R62.2@73.012,16.453 74.047,16.453 v1(74.47,16.03)
  BottomLayer w0.203: v1(69.48,13.5) 73.39,13.5 74.47,14.58 v1(74.47,16.03)
A2: R70.2 U16.12 | length 11.3
  TopLayer w0.254: v1@89.992,13.048 R70.2@89.992,16.459
  BottomLayer w0.254: U16.12@84.113,10.456 84.113,12.043 85.17,13.1 v1(89.992,13.1)
AC24V_L: ST2.2 ST3.7 ST3.8 | length 163.7
  TopLayer w1: ST3.7@-24.13,-11.836 -24.13,-6.61 -21.99,-4.47 -8.94,-4.47 v3(-1.03,3.44) ; v3(24.855,3.455) 38.1,16.7 v3(51.01,16.7)
  BottomLayer w1: v3@-1.03,3.455 v3(24.855,3.455) ; v3(51.01,16.7) 53.16,16.7 56.74,20.28 56.74,32.06 60.4,35.72 100.26,35.72 103.163,32.817 ST2.2@108.763,32.817
AC24V_N: ST2.1 ST3.9 ST3.10 | length 168.4
  TopLayer w1: ST3.9@-26.67,-11.836 -26.67,-5.01 -23.75,-2.09 -11.34,-2.09 v3(-4.5,4.75) ; v3(23.975,6.295) 37.21,19.53 v3(50.96,19.53)
  BottomLayer w1: v3(-4.5,4.75) -2.955,6.295 v3(23.975,6.295) ; v3(50.96,19.53) 52.63,19.53 54.77,21.67 54.77,33.89 59.01,38.13 101.16,38.13 103.933,35.357 ST2.1@108.763,35.357
AC230V_L: C0.2 C35.1 C50.1 C54.2 R52.1 R55.2 R56.1 R82.1 S2.3 ST4.3 ST4.4 | length 374.8
  TopLayer w0.508: C35.1@-36.462,40.532 -33.363,40.532 C0.2@-33.338,40.558 -33.338,45.023 -33.343,45.028 R56.1@-36.462,45.028 ; -33.338,42.753 -21.512,42.753 -19.992,44.273 -19.992,52.693 v2(-21.268,53.969) R52.1@-22.975,53.969 ; R82.1@-22.253,11.482 -22.253,8.217 -22.187,8.15 C50.1@-18.961,8.15 ; S2.3@91.891,-31.633 96.393,-31.633 97.89,-33.13 97.89,-37.72 103.553,-43.383 ST4.3@108.737,-43.383 108.712,-43.409 ST4.4@108.712,-45.949
  BottomLayer w0.508: v2@-24.68,42.753 -24.68,39.56 -17.49,32.37 -17.49,11.68 -19.42,9.75 v2@-22.253,9.75 ; v2(-21.268,53.969) -34.391,53.969 -39.33,49.03 -49.91,49.03 -54.15,44.79 -54.15,-24.39 -46.35,-32.19 47.57,-32.19 55.07,-39.69 89.66,-39.69 91.891,-37.459 S2.3@91.891,-31.633
  other v2: -22.253,9.76 -24.69,42.753
AIR_C: U1.126 U9.11 | length 46.2
  TopLayer w0.254: U1.126@18.939,19.483 22.29,19.483 33.757,30.95 v1(37.4,30.95) ; v1(27.1,30.95) 27.1,35.35 28.69,36.94 32.02,36.94 33.185,38.105 U9.11@33.185,39.191
  BottomLayer w0.254: v1(27.1,30.95) v1(37.4,30.95)
AIR_C_FB: U1.91 U15.7 | length 32.5
  TopLayer w0.254: U1.91@8.239,8.783 8.239,-0.009 9.88,-1.65 v1(14.5,-1.65) ; U15.7@28.296,-5.969 v1(28.296,-4.016)
  BottomLayer w0.254: v1(14.5,-1.65) 25.93,-1.65 v1(28.296,-4.016)
AIR_IN_C: C33.1 D11.1 R47.1 U1.11 | length 70.9
  TopLayer w0.254: U1.11@11.739,30.683 11.739,33.102 22.347,43.71 58.93,43.71 61.43,41.21 68.487,41.21 69.063,40.634 C33.1@69.063,40.026 D11.1@72.238,40.026 ; R47.1@65.049,40.026 66.233,41.21
AIR_PRE: U1.125 U9.13 | length 48.5
  TopLayer w0.254: U1.125@18.939,18.983 22.383,18.983 33.42,30.02 v1@38.35,30.02 ; v1(26.07,29.97) 26.07,35.64 27.95,37.52 29.883,37.52 30.645,38.282 U9.13@30.645,39.191
  BottomLayer w0.254: v1(26.07,29.97) v1(38.35,29.97)
AIR_PRE_C: C34.1 D12.1 R48.1 U1.10 | length 71.1
  TopLayer w0.254: U1.10@12.239,30.683 12.239,33.019 22.47,43.25 57.57,43.25 62.69,38.13 68.639,38.13 69.063,37.707 C34.1@69.063,37.029 D12.1@72.238,37.029 ; R48.1@65.049,37.029 66.15,38.13
AIR_QS_S: C32.1 D10.1 R46.1 U1.12 | length 70.5
  TopLayer w0.254: U1.12@11.239,30.683 11.239,33.259 22.15,44.17 68.534,44.17 69.037,43.667 C32.1@69.037,43.023 D10.1@72.238,43.023 ; R46.1@65.049,43.049 66.171,44.17
ALE1: U1.112 U12.11 | length 46.4
  TopLayer w0.203: 58.029,24.817 U12.11@59.588,23.258
  TopLayer w0.254: U1.112@18.939,12.483 22.119,12.483 34.453,24.817 58.029,24.817
ALE2: U1.113 U13.11 | length 66.8
  TopLayer w0.254: U1.113@18.939,12.983 22.02,12.983 34.264,25.227 69.417,25.227 70.73,26.54 76.27,26.54 77.648,25.162 U13.11@77.648,23.232
B1: R63.2 U16.16 | length 7.2
  TopLayer w0.203: R63.2@71.031,16.453 71.031,15.379 73.953,12.457 U16.16@73.953,10.456
B2: R71.2 U16.11 | length 6.6
  TopLayer w0.254: U16.11@86.653,10.456 86.653,12.343 88.011,13.701 R71.2@88.011,16.448
C1: R64.2 U16.4 | length 23.3
  TopLayer w0.203: R64.2@69.024,16.453 69.024,15.776 72.67,12.13 72.67,0.01 71.413,-1.247 U16.4@71.413,-4.784
C2: R72.2 U16.9 | length 22
  TopLayer w0.203: U16.9@84.113,-4.784 84.113,-0.187 85.39,1.09 85.39,13.23 86.004,13.844 R72.2@86.004,16.448
CEX0: Q2.1 R60.1 U1.67 | length 29
  TopLayer w0.254: Q2.1@-23.457,24.051 -16.391,24.051 -14.87,22.53 -14.87,15.54 -13.927,14.597 -9.807,14.597 -8.693,13.483 U1.67@-2.961,13.483
CEX1: Q3.1 R41.1 U1.68 | length 91.8
  TopLayer w0.254: v1(-9.8,13.51) -9.273,12.983 U1.68@-2.961,12.983 ; R41.1@33.211,6.941 33.223,6.929 Q3.1@33.223,5.131
  BottomLayer w0.254: v1(-9.8,13.51) -9.8,27.77 -4.96,32.61 21.45,32.61 24.16,29.9 24.16,13.91 25.29,12.78 31.99,12.78 33.223,11.547 v1(33.223,6.03)
CEX2: R61.1 U1.66 U17.7 | length 43.1
  TopLayer w0.254: U17.7@-30.214,33.53 -25.926,33.53 R61.1@-24.956,32.56 -17.43,32.56 -14.07,29.2 -14.07,15.93 -13.12,14.98 -9.57,14.98 -8.573,13.983 U1.66@-2.961,13.983
CEX3: R86.1 U0.7 U1.70 | length 35.9
  TopLayer w0.254: U0.7@-30.264,2.816 -18.074,2.816 -15.67,5.22 -15.67,10.34 -14.027,11.983 U1.70@-2.961,11.983 ; -26.226,2.816 R86.1@-24.981,1.572
D1: R65.2 U16.2 | length 24.9
  TopLayer w0.203: U16.2@66.32,-4.81 66.32,-1.55 70.17,2.3 70.17,11.36 69.5,12.03 68.29,12.03 66.992,13.328 R65.2@66.992,16.453
D2: R73.2 U16.7 | length 23.3
  TopLayer w0.203: U16.7@79.033,-4.784 79.033,1.303 82.87,5.14 82.87,12.93 84.023,14.083 R73.2@84.023,16.473
DI_S: C30.1 D8.1 R44.1 U1.13 | length 91.3
  TopLayer w0.254: U1.13@10.739,30.683 10.739,33.469 21.95,44.68 78.353,44.68 80.943,42.09 87.556,42.09 88.062,41.584 C30.1@88.062,40.996 D8.1@91.211,40.996 ; R44.1@84.049,40.996 85.143,42.09
DP1: R69.2 U16.5 | length 37.9
  TopLayer w0.203: R69.2@59.016,16.453 59.016,12.016 v1(59.047,11.986) ; U16.5@73.953,-4.784 73.953,4.343 75.221,5.611 v1(75.221,11.986)
  BottomLayer w0.203: v1(59.047,11.986) v1(75.221,11.986)
DP2: R77.2 U16.10 | length 38
  TopLayer w0.203: v1(75.997,14.507) R77.2@75.997,16.448 ; U16.10@86.653,-4.784 86.653,7.213 91.31,11.87 v1(91.31,12.99)
  BottomLayer w0.203: v1(75.997,14.507) 90.473,14.507 91.31,13.67 v1(91.31,12.99)
E1: R66.2 U16.1 | length 24.1
  TopLayer w0.203: U16.1@63.793,-4.784 63.73,-4.846 63.73,-1.11 67.61,2.77 67.61,11.28 64.935,13.955 R66.2@64.935,16.428
E2: R74.2 U16.6 | length 23.5
  TopLayer w0.203: U16.6@76.493,-4.784 76.493,1.573 80.34,5.42 80.34,13.04 82.017,14.717 R74.2@82.017,16.448
F1: R67.2 U16.19 | length 7.4
  TopLayer w0.203: R67.2@63.004,16.453 63.004,13.756 66.304,10.456 U16.19@66.333,10.456
F2: R75.2 U16.14 | length 6.4
  TopLayer w0.254: U16.14@79.033,10.456 79.033,13.703 80.01,14.68 R75.2@80.01,16.448
FIR_S: U1.132 U9.1 | length 18.2
  TopLayer w0.254: U1.132@18.939,22.483 22.773,22.483 29.375,29.085 U9.1@29.375,34.133
G1: R68.2 U16.20 | length 7.2
  TopLayer w0.203: R68.2@60.998,16.453 60.998,13.252 U16.20@63.793,10.456
G2: R76.2 U16.15 | length 6.6
  TopLayer w0.203: U16.15@76.493,10.456 76.493,13.103 78.003,14.613 R76.2@78.003,16.473
GND: C0.1 C1.1 C2.1 C3.2 C9.2 C10.2 C11.2 C12.2 C13.2 C14.2 C15.2 C16.2 C17.2 C18.2 C19.2 C20.2 C21.2 C28.2 C29.2 C30.2 C31.2 C32.2 C33.2 C34.2 C36.2 C37.2 C38.2 C39.2 C40.1 C41.1 C43.2 C51.2 C52.2 C53.2 C54.1 C56.2 D4.1 D5.4 J1.4 J1.6 J1.8 J1.10 J1.12 J1.14 J1.16 J1.18 J1.20 L1.1 Q2.2 Q3.2 Q5.2 R5.2 R6.2 R15.1 R20.2 R57.2 S3.2 ST2.6 ST2.7 ST3.5 ST3.6 U0.4 U1.16 U1.38 U1.51 U1.61 U1.71 U1.83 U1.94 U1.107 U1.120 U1.130 U1.143 U3.4 U4.4 U5.4 U6.4 U8.7 U8.8 U9.7 U10.4 U12.1 U12.10 U13.1 U13.10 U14.4 U15.4 U17.4 | length 170.4
  TopLayer w0.254: U1.71@-2.961,11.483 -1.107,11.483 -0.61,11.98 v1(-0.61,13.25) ; U1.61@-2.961,16.483 -1.077,16.483 v1@0.28,17.84 ; U1.51@-2.961,21.483 -1.047,21.483 -0.53,22 v1(-0.53,22.3) ; U1.38@-2.961,27.983 v1(0.79,27.983) ; v1(2.45,11.15) 3.53,11.15 4.239,10.441 U1.83@4.239,8.783 ; v1(8.02,11.17) 8.98,11.17 9.739,10.411 U1.94@9.739,8.783 ; U1.16@9.239,30.683 9.239,28.841 9.82,28.26 v1(10.91,28.26) ; v1(14.41,11.16) 15.81,11.16 16.239,10.731 U1.107@16.239,8.783 ; v1(15.77,26.75) 17.003,27.983 U1.143@18.939,27.983 ; v1(16.46,14.69) 16.46,15.71 17.233,16.483 U1.120@18.939,16.483 ; v1(16.52,18.82) 16.52,21.08 16.923,21.483 U1.130@18.939,21.483 ; v1(66.284,40.026) C33.2@67.539,40.026 ; v1(66.303,43.023) C32.2@67.513,43.023 ; v1(67.539,34.541) C34.2@67.539,37.029 ; v1(85.277,49.987) C28.2@86.538,49.987 ; v1(85.28,46.99) C29.2@86.538,46.99 ; v1(85.293,43.993) C31.2@86.538,43.993 ; v1(85.306,40.996) C30.2@86.538,40.996
  TopLayer w0.508: v2(-43.039,31.041) C36.2@-41.441,31.041 ; C52.2@-41.466,-0.435 -36.564,-0.435 U0.4@-35.852,0.276 ; R15.1@-39.497,-28.016 -40.504,-28.016 -42.05,-26.47 -42.05,-18.89 -41.169,-18.009 D5.4@-38.811,-18.009 ; C37.2@-38.876,30.99 U17.4@-35.802,30.99 ; C21.2@-29.972,-26.467 v2(-28.547,-26.467) ; v2(-29.909,38.321) C0.1@-29.909,40.558 ; v2(-28.489,-0.92) C51.2@-27.496,0.073 ; v2(-27.861,-18.009) U6.4@-26.34,-18.009 ; C38.2@-27.445,31.01 -28.436,30.02 -28.436,27.906 v2(-27.35,26.82) -24.27,26.82 Q2.2@-23.457,26.007 ; R57.2@-26.378,45.003 -25.891,45.49 v2(-25.04,45.49) ; C54.1@-25.642,8.176 -25.137,8.68 v2(-24.28,8.68) ; v2(-5.817,-20.477) U3.4@-5.817,-17.983 ; v2(-4.555,41.835) C2.1@-2.962,41.835 ; v2(1.63,-15.01) 2.202,-15.582 U5.4@2.202,-17.993 ; v2(2.184,-7.974) U4.4@2.184,-5.994 ; C1.1@6.563,41.835 v2(8.015,41.835) ; Q5.2@10.998,-7.899 10.998,-8.708 11.92,-9.63 15.396,-9.63 D4.1@16.002,-10.236 ; L1.1@11.689,50.554 v2(13.996,50.554) ; R20.2@17.76,-22.152 v2(19.118,-22.152) ; U15.4@30.836,-11.557 v2(32.036,-10.356) ; v2(31.664,3.226) Q3.2@33.223,3.226 ; C56.2@32.512,-18.034 U10.4@34.696,-18.034 ; U9.7@36.995,33.603 v2(38.243,33.603) ; U14.4@38.329,-11.532 v2(39.58,-11.532) ; v2(38.61,40.34) 38.61,39.55 38.969,39.191 U8.7@41.266,39.191 ; C43.2@55.27,-26.518 59.169,-30.417 S3.2@59.169,-31.633 ; v2(55.82,50.19) C3.2@57.277,50.19 ; U12.10@59.588,30.658 59.588,32.098 v2(60.57,33.08) ; U12.1@71.018,30.658 71.018,32.478 v2(71.64,33.1) ; C40.1@74.016,24.79 v2(75.41,24.79) ; v2(77.11,33.15) 77.648,32.612 U13.10@77.648,30.632 ; U13.1@89.078,30.632 89.078,32.388 v2(89.69,33) ; v2(89.81,25.94) 90.951,25.94 C41.1@91.999,24.892
  BottomLayer w0.254: C13.2@-0.635,16.891 -0.635,16.925 v1@0.28,17.84 ; C14.2@-0.61,11.938 v1(-0.61,13.25) ; C19.2@-0.61,28.753 -0.61,28.39 -0.203,27.983 v1(0.79,27.983) ; R6.2@-0.584,25.07 v1(0.5,25.07) ; C15.2@-0.53,21.289 v1(-0.53,22.3) ; v1(2.45,11.15) C18.2@3.658,11.151 ; v1(8.02,11.17) 9.201,11.17 C16.2@9.22,11.151 ; C10.2@9.652,28.27 9.662,28.26 v1(10.91,28.26) ; v1(14.41,11.16) 15.52,11.16 C17.2@15.539,11.141 ; v1(15.169,23.851) R5.2@16.535,23.851 ; v1@15.777,26.75 C9.2@16.561,27.534 ; v1(16.46,14.69) 16.46,15.81 C12.2@16.575,15.926 ; v1(16.52,18.82) C11.2@16.52,20.101
  BottomLayer w0.508: v2(3.364,20.396) C20.2@6.147,20.396
  other v1: 0.25,17.87
  other v2: 33.77,-18.034 -39.971,-18.009 13.48,-9.63 -39.99,-0.435 -37.64,30.99
GNDK: C42.1 S2.2 ST4.6 | length 48.9
  TopLayer w0.508: C42.1@78.232,-26.518 81.941,-30.227 81.941,-44.161 89.012,-51.232 ST4.6@108.687,-51.232
GZ_S: U1.90 U4.2 | length 16
  TopLayer w0.254: U4.2@4.724,-5.994 4.724,-2.853 7.739,0.162 U1.90@7.739,8.783
GZ_S_FB: U1.89 U3.1 | length 33
  TopLayer w0.254: U3.1@-2.007,-17.983 -2.007,-15.747 -0.52,-14.26 v1(-0.52,-3.49) ; v1(2.5,-3.5) 3.537,-3.5 7.239,0.202 U1.89@7.239,8.783
  BottomLayer w0.254: v1(-0.52,-3.49) v1@2.49,-3.49
IG_C: U1.129 U9.3 | length 20.3
  TopLayer w0.254: U1.129@18.939,20.983 21.973,20.983 31.915,30.925 U9.3@31.915,34.133
IG_C_FB: U1.124 U14.1 | length 73.5
  TopLayer w0.203: U14.1@34.519,-11.532 v1(34.519,-9.53)
  TopLayer w0.254: U1.124@18.939,18.483 22.423,18.483 32.98,29.04 40.73,29.04 v1(41.39,29.7)
  BottomLayer w0.203: v1(34.519,-9.53) 38.47,-9.53 41.36,-6.64 v1@41.36,29.7
IG_SW: U1.88 U4.5 | length 24.4
  TopLayer w0.254: U4.5@2.184,-11.582 0.99,-10.388 0.99,-3.51 1.957,-2.543 3.947,-2.543 6.739,0.249 U1.88@6.739,8.783